# EAGLE board ECG (EAGLE 9.6.2)
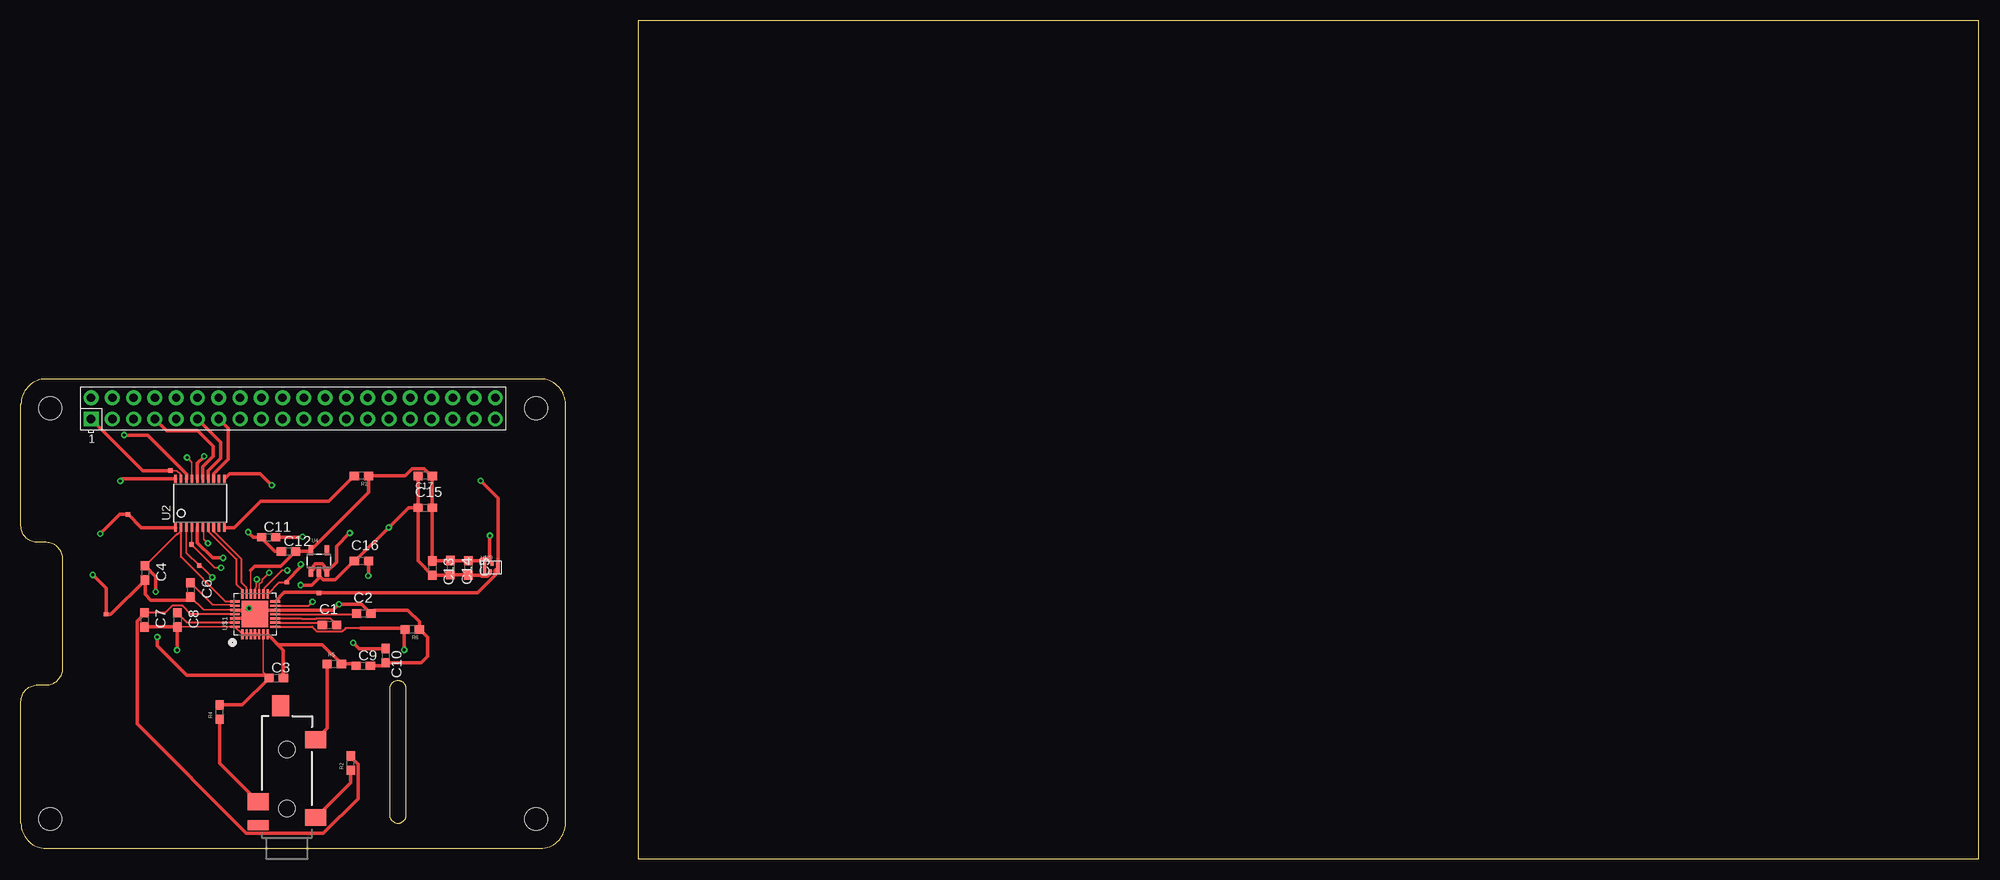
[diagram p0: board, top side]
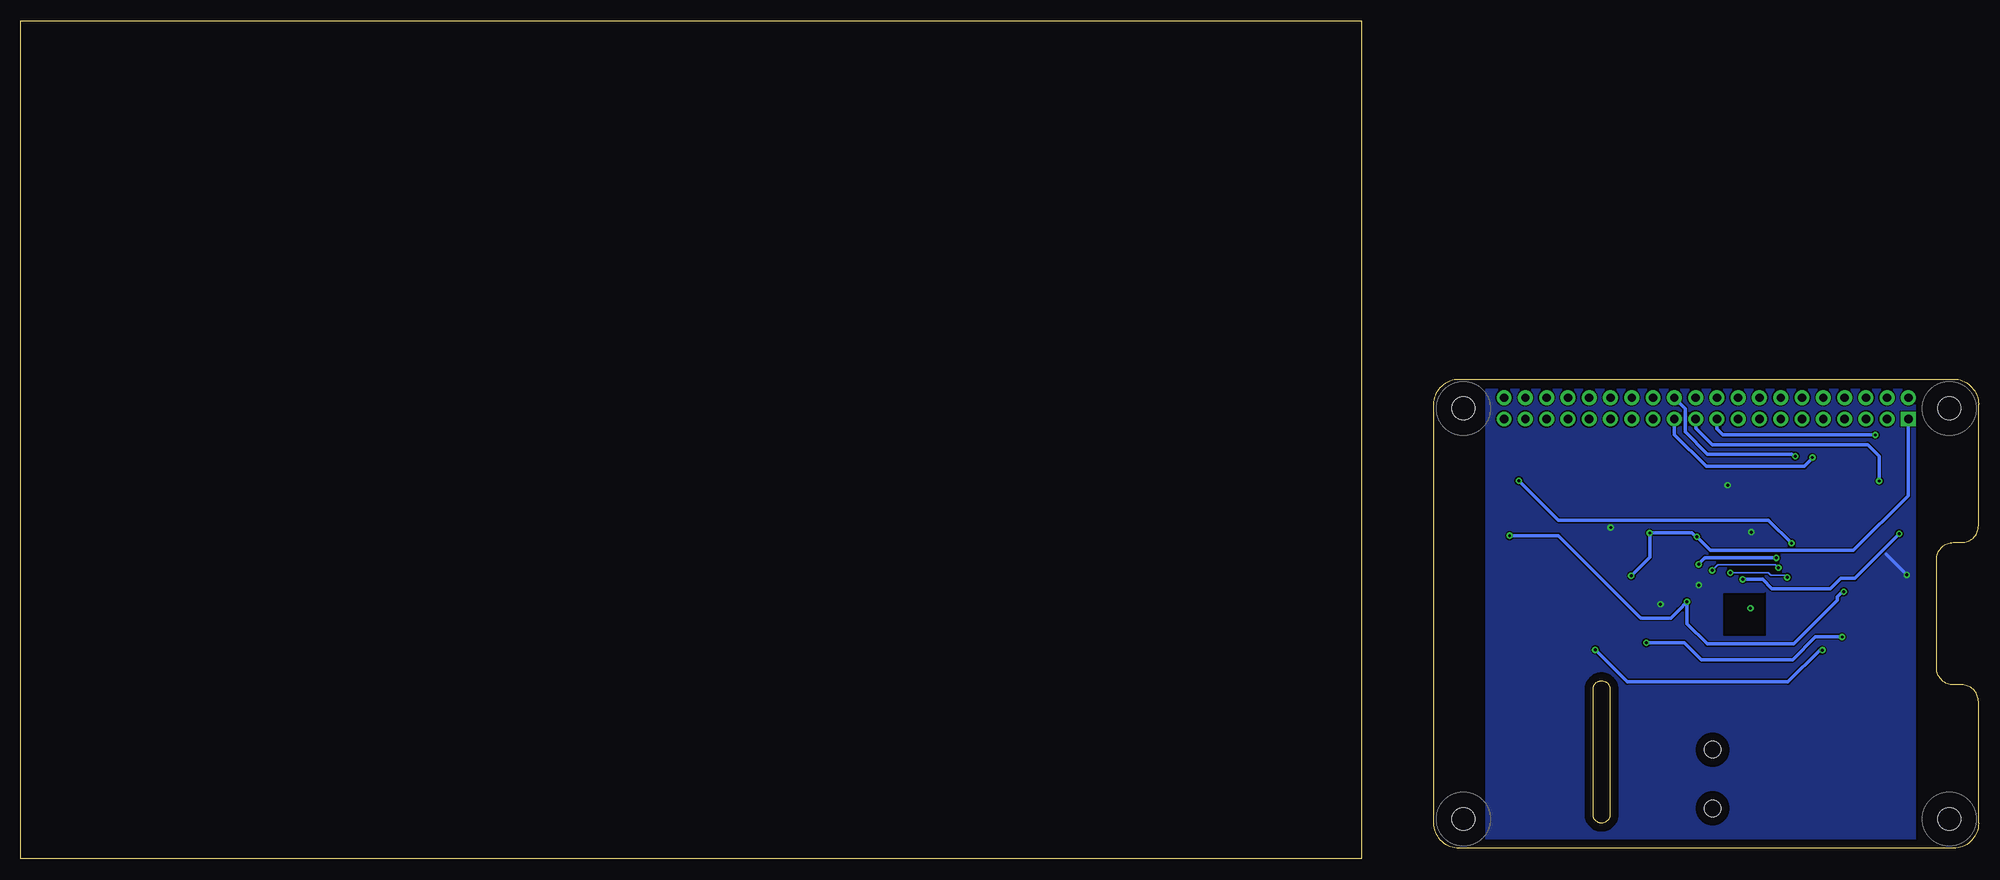
[diagram p1: board, bottom side, seen from below]

Size 233.66 x 100 mm. Coordinates in mm from the lower left corner, seen from the top.
Outline: 73.66,0 233.66,0 233.66,100 73.66,100 73.66,0
Copper layers (1*16): Top 0.035mm / dielectric 1.5mm / Bottom 0.035mm
Design rules "default": minimum track width 6mil, minimum drill 0.35mm, track to track 6mil, track to pad 6mil, pad to pad 6mil, via to via 6mil, smd to smd 6mil, copper to edge 40mil, drill to drill 6mil, minimum pad ring 10mil, minimum via ring 8mil, stop-mask expansion 4mil, vias tented up to drill 0mil, thermal gap 10mil

## Footprints (pad centres in the part's own frame; a part is rotated, then mirrored left to right if it is on the bottom)
0603 = smd 1.1 x 1: 1 -0.85,0; 2 0.85,0
AUDIO-JACK-3.5MM-SMD = smd 2 x 2.5: RING 4.3,3.45; SLEEVE 2.4,-3.45; TIP 11.7,-3.45 | smd 1.2 x 2.5: RSH 1.5,3.45 | smd 2.5 x 2: TSH 15.75,0.75 | hole 2: 3.5,0; 10.5,0
PAD.02X.02 = smd 0.508 x 0.508: P$1 0,0
TSSOP20 = smd 0.305 x 0.991: 1 -2.925,-2.918; 2 -2.275,-2.918; 3 -1.625,-2.918; 4 -0.975,-2.918; 5 -0.325,-2.918; 6 0.325,-2.918; 7 0.975,-2.918; 8 1.625,-2.918; 9 2.275,-2.918; 10 2.925,-2.918; 11 2.925,2.918; 12 2.275,2.918; 13 1.625,2.918; 14 0.975,2.918; 15 0.325,2.918; 16 -0.325,2.918; 17 -0.975,2.918; 18 -1.625,2.918; 19 -2.275,2.918; 20 -2.925,2.918
SOT23-5 = smd 0.55 x 1.2: 1 -0.95,-1.3; 2 0,-1.3; 3 0.95,-1.3; 4 0.95,1.3; 5 -0.95,1.3
QFN-28 = smd 1.15 x 0.27: 1 -2.4,1.5; 2 -2.4,1; 3 -2.4,0.5; 4 -2.4,0; 5 -2.4,-0.5; 6 -2.4,-1; 7 -2.4,-1.5; 15 2.4,-1.5; 16 2.4,-1; 17 2.4,-0.5; 18 2.4,0; 19 2.4,0.5; 20 2.4,1; 21 2.4,1.5 | smd 0.27 x 1.15: 8 -1.5,-2.4; 9 -1,-2.4; 10 -0.5,-2.4; 11 0,-2.4; 12 0.5,-2.4; 13 1,-2.4; 14 1.5,-2.4; 22 1.5,2.4; 23 1,2.4; 24 0.5,2.4; 25 0,2.4; 26 -0.5,2.4; 27 -1,2.4; 28 -1.5,2.4 | smd 3.15 x 3.15: THERMAL 0,0
SIT1533 = smd 0.4 x 1.4: 1 -0.8,0; 3 0.8,0 | smd 0.3 x 0.5: 2 -0.1,-0.45; 4 0.1,0.45
RASPI_BOARD_B+HAT_DF_CF = drill 1 pad 1.778 square: 1 8.37,51.23 | drill 1 pad 1.778: 2 8.37,53.77; 3 10.91,51.23; 4 10.91,53.77; 5 13.45,51.23; 6 13.45,53.77; 7 15.99,51.23; 8 15.99,53.77; 9 18.53,51.23; 10 18.53,53.77; 11 21.07,51.23; 12 21.07,53.77; 13 23.61,51.23; 14 23.61,53.77; 15 26.15,51.23; 16 26.15,53.77; 17 28.69,51.23; 18 28.69,53.77; 19 31.23,51.23; 20 31.23,53.77; 21 33.77,51.23; 22 33.77,53.77; 23 36.31,51.23; 24 36.31,53.77; 25 38.85,51.23; 26 38.85,53.77; 27 41.39,51.23; 28 41.39,53.77; 29 43.93,51.23; 30 43.93,53.77; 31 46.47,51.23; 32 46.47,53.77; 33 49.01,51.23; 34 49.01,53.77; 35 51.55,51.23; 36 51.55,53.77; 37 54.09,51.23; 38 54.09,53.77; 39 56.63,51.23; 40 56.63,53.77 | hole 2.75: 3.5,3.5; 3.5,52.5; 61.5,3.5; 61.5,52.5

## Placement (x,y rotation side)
C1  1.0uF  [0603]  36.83,27.94 0 top
C2  1nF  [0603]  40.92,29.3 0 top
C3  1nF  [0603]  30.48,21.59 0 top
C4  10uF  [0603]  14.81,34.13 270 top
C5  1.0uF  [0603]  53.4,34.73 270 top
C6  10uF  [0603]  20.25,32.1 270 top
C7  10uF  [0603]  14.73,28.54 270 top
C8  1.0uF  [0603]  18.67,28.53 270 top
C9  1nF  [0603]  40.86,23.05 0 top
C10  1nF  [0603]  43.53,24.26 270 top
C11  0.1uF  [0603]  29.57,38.39 0 top
C12  0.1uF  [0603]  31.95,36.7 0 top
C13  1.0uF  [0603]  49.11,34.71 270 top
C14  10uF  [0603]  51.28,34.76 270 top
C15  1.0uF  [0603]  48.26,41.91 0 top
C16  1.0uF  [0603]  40.64,35.56 0 top
C17  1.0uF  [0603]  48.26,45.72 180 top
JP3  [AUDIO-JACK-3.5MM-SMD]  31.75,2.54 90 top
R1  0.05  [0603]  40.64,45.72 180 top
R2  0.05  [0603]  39.37,11.43 90 top
R4  47k  [0603]  23.72,17.53 90 top
R5  47k  [0603]  37.41,23.28 0 top
R6  0.05  [0603]  46.72,27.39 180 top
TP1  TEST-POINT2  [PAD.02X.02]  21.27,35.03 0 top
TP2  TEST-POINT2  [PAD.02X.02]  12.78,41.11 0 top
TP3  TEST-POINT2  [PAD.02X.02]  31.75,33.02 0 top
TP4  TEST-POINT2  [PAD.02X.02]  10.16,29.21 0 top
TP5  TEST-POINT2  [PAD.02X.02]  35.56,31.75 0 top
TP6  TEST-POINT2  [PAD.02X.02]  17.85,46.34 0 top
TP8  TEST-POINT2  [PAD.02X.02]  20.34,37.54 0 top
U2  TXB0108PWR  [TSSOP20]  21.38,42.46 0 top
U4  AP2112K-1.8V  [SOT23-5]  35.56,35.56 0 top
U$1  MAX30003CTI+  [QFN-28]  27.94,29.21 90 top
U$29  SIT1533  [SIT1533]  56.14,34.78 0 top
X1  RASPI_BOARD_B+_HDC  [RASPI_BOARD_B+HAT_DF_CF]  0,1.27 0 top

## Library data of the parts
C1 C5 C8 C13 C15-C17 = SparkFun-Capacitors; PROD_ID: CAP-00868
C2 C3 C9 C10 = SparkFun-Capacitors; PROD_ID: CAP-07886
C4 C6 C7 C14 = SparkFun-Capacitors; PROD_ID: CAP-11015
C11 C12 = SparkFun-Capacitors; PROD_ID: CAP-00810
JP3 = SparkFun-Connectors; PROD_ID: CONN-10353
R1 R2 R6 = SparkFun-Resistors; PROD_ID: RES-12535
R4 R5 = SparkFun-Resistors; PROD_ID: RES-07871
TP1-TP6 TP8 = SparkFun-Connectors
U2 = adafruit
U4 = SparkFun-PowerIC; PROD_ID: VREG-12457
U$1 U$29 = circuitects
X1 = raspberrypi_bastelstube_v13

## Nets
5V0: X1.2
+1.8V: C4.1 C5.1 C12.2 C13.1 C14.1 C15.2 C17.1 R1.1 U2.2 U4.5 U$1.13 U$1.19 U$1.22 U$29.4
AGND: C7.2 C8.2 R6.2 U$1.1 U$1.2 U$1.3 U$1.4 U$1.5 U$1.8 U$1.28
CSB: TP3.P$1 U2.5 U$1.15
CSB_OUT: U2.16 X1.24
ECGN: C3.2 C9.1 R5.2 U$1.7
ECGP: C3.1 C10.1 R4.2 U$1.6
FCLK: TP5.P$1 U2.6 U$1.14 U$29.3
FCLK_OUT: U2.15 X1.7
GND: C2.2 C4.2 C5.2 C6.2 C9.2 C10.2 C11.1 C12.1 C13.2 C14.2 C15.1 C16.1 C17.2 R6.1 TP4.P$1 U2.11 U4.2 U$1.12 U$1.24 U$1.26 U$1.THERMAL U$29.2
INT2B: U2.8 U$1.20
INT2B_OUT: U2.13 X1.13
INTB: U2.7 U$1.21
INTB_OUT: U2.14 X1.11
MISO: TP2.P$1 U2.1 U$1.18
MISO_OUT: U2.20 X1.21
MOSI: TP1.P$1 U2.3 U$1.17
MOSI_OUT: U2.18 X1.19
N$1: R1.2 U2.10
N$2: C6.1 U$1.23
N$3: C1.1 U$1.9
N$4: JP3.SLEEVE R2.1
N$5: X1.6
N$6: C1.2 U$1.10
N$7: C2.1 U$1.11
N$9: JP3.TIP R5.1
N$10: JP3.RING R4.1
N$14: C8.1 U$1.27
SCLK: TP8.P$1 U2.4 U$1.16
SCLK_OUT: U2.17 X1.23
VCM: C7.1 R2.2 U$1.25
VDD: C11.2 C16.2 TP6.P$1 U2.19 U4.1 U4.3 X1.1

## Tracks (layer width: path | path; a pad name or v marks a point on that pad's centre or on a via)
+1.8V  (via drill 0.35)
  Top 0.203: 27.44,34.46 U$1.19
  Top 0.254: U$1.22 24.43,30.71 19.1,36.03 U2.2 19.1,39.15 18.72,38.77 18.6,38.77 C4.1 | U$1.13 34.32,30.21 v34.81,30.7
  Top 0.406: v16.09,31.88 16.09,33.7 C4.1 | 27.44,34.46 27.9,34.92 31.02,34.92 C12.2 34.45,36.7 U4.5 41.49,43.74 R1.1 45.86,45.72 46.71,46.58 48.11,46.58 48.96,45.72 C17.1 C15.2 C13.1 51.23,35.56 C14.1 53.37,35.61 C5.1 54.74,35.58 54.99,35.84 55.69,35.84 55.9,35.63 55.9,35.57 U$29.4 55.97,35.5 v55.97,38.58
  Bottom 0.406: v16.09,31.88 16.25,31.88 16.84,31.29 16.84,30.88 22.06,25.66 32.4,25.66 34.81,28.07 v34.81,30.7 34.81,30.67 35.79,29.69 35.79,29.66 36.71,28.75 40.31,28.75 50.15,38.58 v55.97,38.58
AGND  (via drill 0.35)
  Top 0.203: U$1.1 U$1.28 18.7,27.71 18.64,27.65
  Top 0.254: 18.7,27.71 C8.2 | U$1.8 34.76,27.71 35.31,27.16 38.35,27.16 38.73,27.55 40.56,27.55
  Top 0.406: C7.2 C8.2 18.64,27.65 v18.64,24.92 | U$1.1 U$1.2 U$1.3 U$1.4 U$1.5 | 40.56,27.55 45.71,27.55 R6.2 45.75,27.27 v45.75,24.95
  Bottom 0.406: v18.64,24.92 18.95,24.92 22.74,21.13 41.93,21.13 v45.75,24.95
CSB  (via drill 0.35)
  Top 0.254: U$1.15 30.85,33.02 TP3.P$1
  Top 0.406: TP3.P$1 31.75,33.21 33.4,34.86 v33.4,35.15 | v24.15,35.93 22.88,35.93 22.87,35.92 21.05,37.73 U2.5
  Bottom 0.406: v33.4,35.15 33.4,35.22 32.67,35.95 24.17,35.95 v24.15,35.93
CSB_OUT  (via drill 0.35)
  Top 0.406: U2.16 21.05,47.2 21.87,48.01 v21.87,48.06
  Bottom 0.406: X1.24 35.01,53.74 35.01,50.95 32.38,48.32 22.3,48.32 22.04,48.06 v21.87,48.06
ECGN
  Top 0.406: C9.1 39.78,23.28 R5.2 35.98,25.56 30.69,25.56 U$1.7 31.33,24.92 C3.2
ECGP  (via drill 0.35)
  Top 0.203: U$1.6 28.94,22.28 C3.1
  Top 0.406: R4.2 26.42,18.38 C3.1 29.29,21.93 19.81,21.93 16.29,25.45 v16.29,26.49 | v39.65,25.81 40.35,25.11 C10.1
  Bottom 0.406: v16.29,26.49 19.46,26.49 22.17,23.78 33.11,23.78 35.14,25.81 v39.65,25.81
FCLK  (via drill 0.35)
  Top 0.203: U2.6 21.83,39.42 21.83,38.17 v22.32,37.68
  Top 0.406: U$1.14 31.44,31.81 35.5,31.81 TP5.P$1 54.5,31.75 56.6,33.85 56.6,34.44 U$29.3 56.94,43.06 v54.87,45.13
  Bottom 0.406: v22.32,37.68 25.08,40.44 50.18,40.44 v54.87,45.13
FCLK_OUT
  Top 0.406: U2.15 21.7,46.81 22.94,48.05 22.94,49.23 21.09,51.08 17.41,51.08 X1.7
GND  (via drill 0.35)
  Top 0.203: C6.2 21.79,29.71 U$1.24
  Top 0.406: C17.2 C15.1 | 47.41,37.69 C15.1 | C15.1 47.41,35.56 C13.2 51.23,33.86 C14.2 53.37,33.91 C5.2 54.84,33.88 54.99,33.72 55.69,33.72 55.9,33.93 55.9,34.19 U$29.2 | C6.2 19.89,30.89 15.5,30.89 14.81,31.58 C4.2 10.74,29.21 TP4.P$1 10.16,32.3 v8.56,33.9 | C12.1 30.27,36.7 28.72,38.25 C11.1 27.73,38.39 v27.12,39 | C15.1 46.27,41.91 v43.91,39.55 39.92,35.56 C16.1 37.53,33.3 36.09,33.3 35.56,33.83 U4.2 35.56,33.51 34.73,32.68 v33.38,32.68 | U$1.12 | U$1.12 37.21,29.7 37.91,30.4 v37.96,30.4 40.67,30.4 C2.2 42.16,29.69 46.17,29.69 47.57,28.29 R6.1 48.53,26.43 48.53,24.17 47.77,23.41 C10.2 43.17,23.05 C9.2 | U$1.THERMAL 27.44,28.71 U$1.26 | U$1.24 26.26,29.7 26.75,29.21 U$1.THERMAL | U$1.THERMAL 28.43,29.7 U$1.12 | U2.11 24.89,45.96 28.58,45.96 v29.94,44.6
  Bottom 0.406: v33.38,32.68 33.38,32.79 | 11,36.34 v8.56,33.9
  pour Bottom: 7.66,56 7.66,2 58.66,2 58.66,56
INT2B
  Top 0.254: U2.8 23.06,39.48 23.06,39.03 26.29,35.8 26.29,33 26.94,32.35 U$1.20
INT2B_OUT
  Top 0.406: X1.13 24.73,51.38 24.73,47.69 23,45.96 U2.13
INTB
  Top 0.254: U$1.21 26.44,32.05 25.7,32.79 25.7,35.78 22.38,39.1 22.38,39.52 U2.7
INTB_OUT
  Top 0.406: U2.14 22.35,46.33 23.85,47.83 23.85,49.72 X1.11
MISO  (via drill 0.35)
  Top 0.203: U$1.18 27.94,32.27 28.08,32.41 28.08,33.29 v28.15,33.36
  Top 0.406: U2.1 14.35,39.54 TP2.P$1 11.77,41.11 v9.46,38.8
  Bottom 0.406: v9.46,38.8 14.77,33.49 16.43,33.49 17.67,32.25 24.67,32.25 25.78,33.36 v28.15,33.36
MISO_OUT  (via drill 0.35)
  Top 0.406: U2.20 12.14,45.38 v11.86,45.1
  Bottom 0.406: v11.86,45.1 11.86,48.06 13.24,49.45 31.8,49.45 33.77,51.41 X1.21
MOSI  (via drill 0.35)
  Top 0.203: U$1.17 28.44,32.76 28.78,33.1 28.78,33.3 v29.63,34.15 | v22.84,33.6 21.41,35.03 TP1.P$1 19.75,36.55 U2.3
  Bottom 0.203: v29.63,34.15 25.11,34.15 24.82,33.86 23.1,33.86 v22.84,33.6
MOSI_OUT  (via drill 0.35)
  Top 0.406: U2.18 19.76,45.39 19.76,45.94 15.11,50.59 v12.32,50.59
  Bottom 0.406: X1.19 31.23,51.31 30.54,50.62 12.35,50.62 v12.32,50.59
N$1
  Top 0.406: U2.10 25.45,39.54 28.6,42.68 36.75,42.68 R1.2
N$2
  Top 0.203: U$1.23 25.43,30.32 22.89,30.32 C6.1
N$3
  Top 0.254: U$1.9 35.71,28.21 C1.1
N$4
  Top 0.406: JP3.SLEEVE 39.37,9.11 R2.1
N$6
  Top 0.254: U$1.10 33.47,28.71 33.54,28.64 35.24,28.64 35.31,28.72 36.9,28.72 C1.2
N$7
  Top 0.254: U$1.11 39.98,29.21 C2.1
N$8  (via drill 0.35)
  other vias: 27.23,29.92
N$9
  Top 0.406: JP3.TIP 36.56,15.6 R5.1
N$10
  Top 0.406: JP3.RING 23.72,11.42 R4.1
N$14
  Top 0.254: U$1.27 19.84,28.21 C8.1
SCLK  (via drill 0.35)
  Top 0.203: U$1.16 29.05,31.72 29.05,32.29 31.2,34.44 v31.79,34.44 | v23.88,34.75 23.13,34.75 TP8.P$1 20.47,37.67 20.4,37.74 U2.4
  Bottom 0.203: v23.88,34.75 24.26,35.13 31.1,35.13 v31.79,34.44
SCLK_OUT  (via drill 0.35)
  Top 0.203: U2.17 20.4,47.34 v19.83,47.91
  Bottom 0.406: X1.23 36.29,52.48 36.29,50.64 32.5,46.85 20.79,46.85 19.83,47.8 v19.83,47.91
THERMALGND
  cutout Bottom: 25.47,31.76 25.47,26.73 25.46,26.72 30.41,26.72 30.41,31.66 25.52,31.66
VCM
  Top 0.254: U$1.25 20.28,29.21 19.29,30.21 18.05,30.21 17.23,29.39 C7.1
  Top 0.406: C7.1 14.73,29.24 13.87,28.39 13.87,16.11 26.9,3.08 36.1,3.08 40.23,7.21 40.23,11.28 39.37,12.13 R2.2
VDD  (via drill 0.35)
  Top 0.203: U2.19 19.06,45.42 19.06,45.9 18.62,46.34 TP6.P$1
  Top 0.406: TP6.P$1 14.53,46.34 X1.1 | U4.1 34.93,34.58 34.93,35.01 35.14,35.22 35.98,35.22 36.19,35.01 36.19,34.58 U4.3 37.68,35.43 37.68,37.32 v39.26,38.9 | C16.2 41.49,33.83 v41.46,33.8 | v33.63,38.45 33.57,38.39 C11.2
  Bottom 0.406: v41.46,33.8 39.26,36 v39.26,38.9 34.23,38.9 33.7,38.38 v33.63,38.45 32,36.82 14.93,36.82 8.41,43.34 8.41,52.46 X1.1